# Altium PCB DC TO DC.PcbDoc
Units mil, origin at the board's own origin, x right, y up, seen from the top; angles counter-clockwise.
Board outline 2559.01 x 1392.01 mil, 2 copper layers (Top Layer, Bottom Layer); 10 components, 6 nets, 27 pads, 0 vias.
Unrouted connection lines stored in the file: 2.
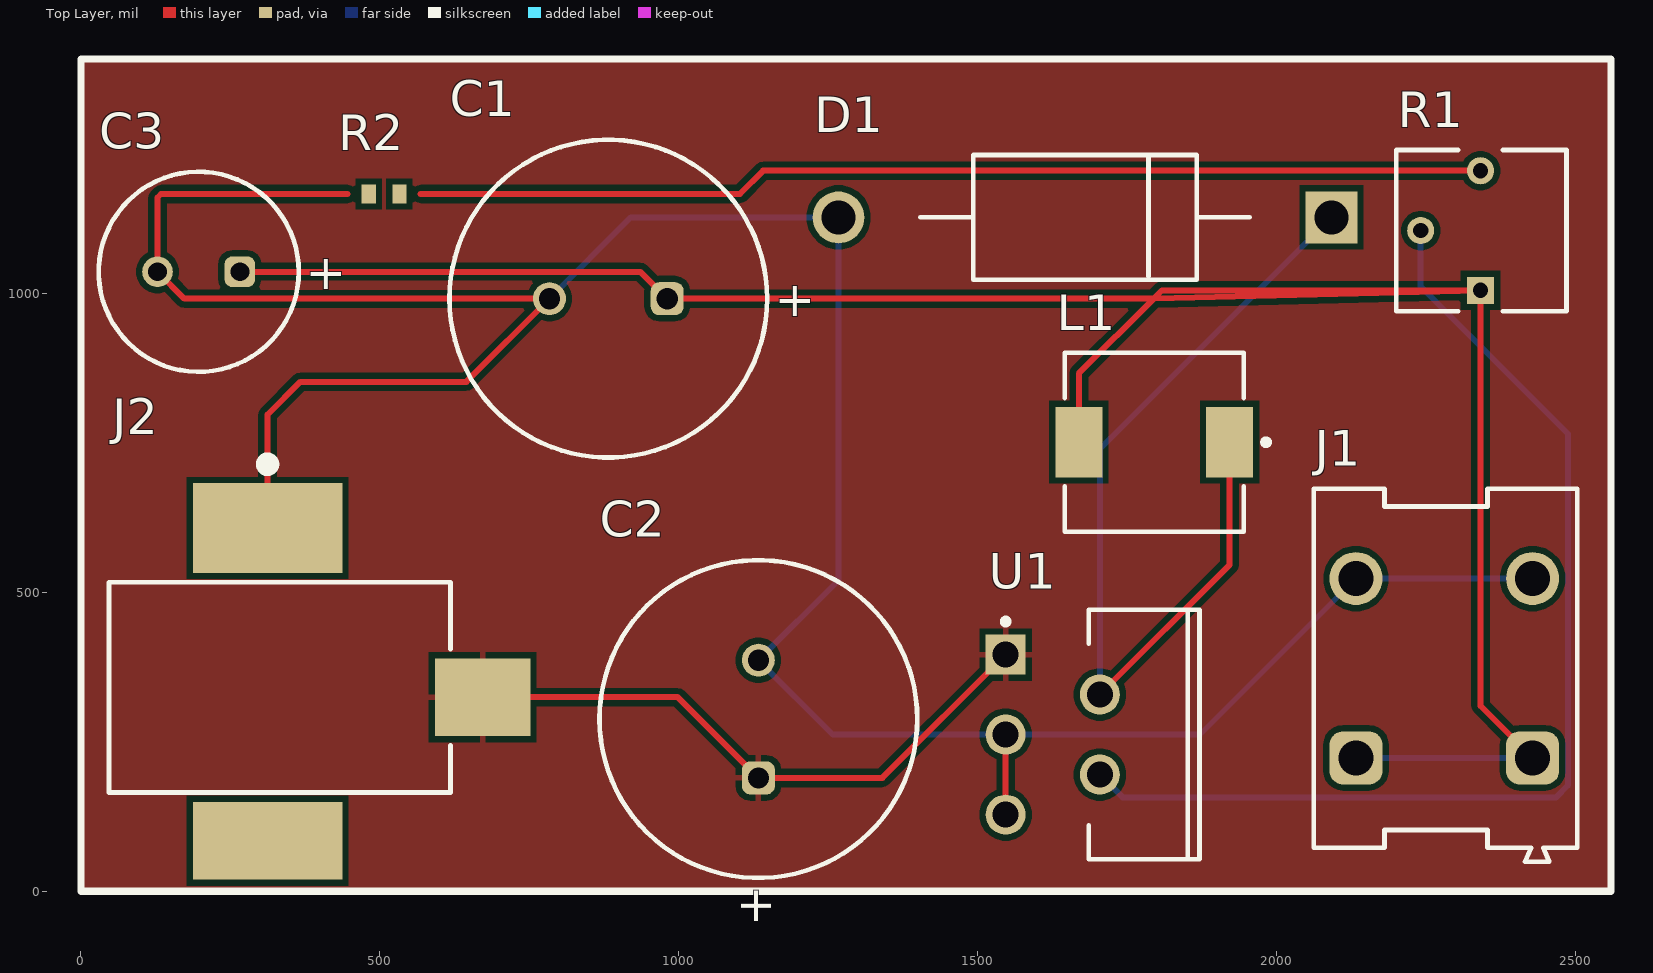
[diagram p0: Top Layer view]
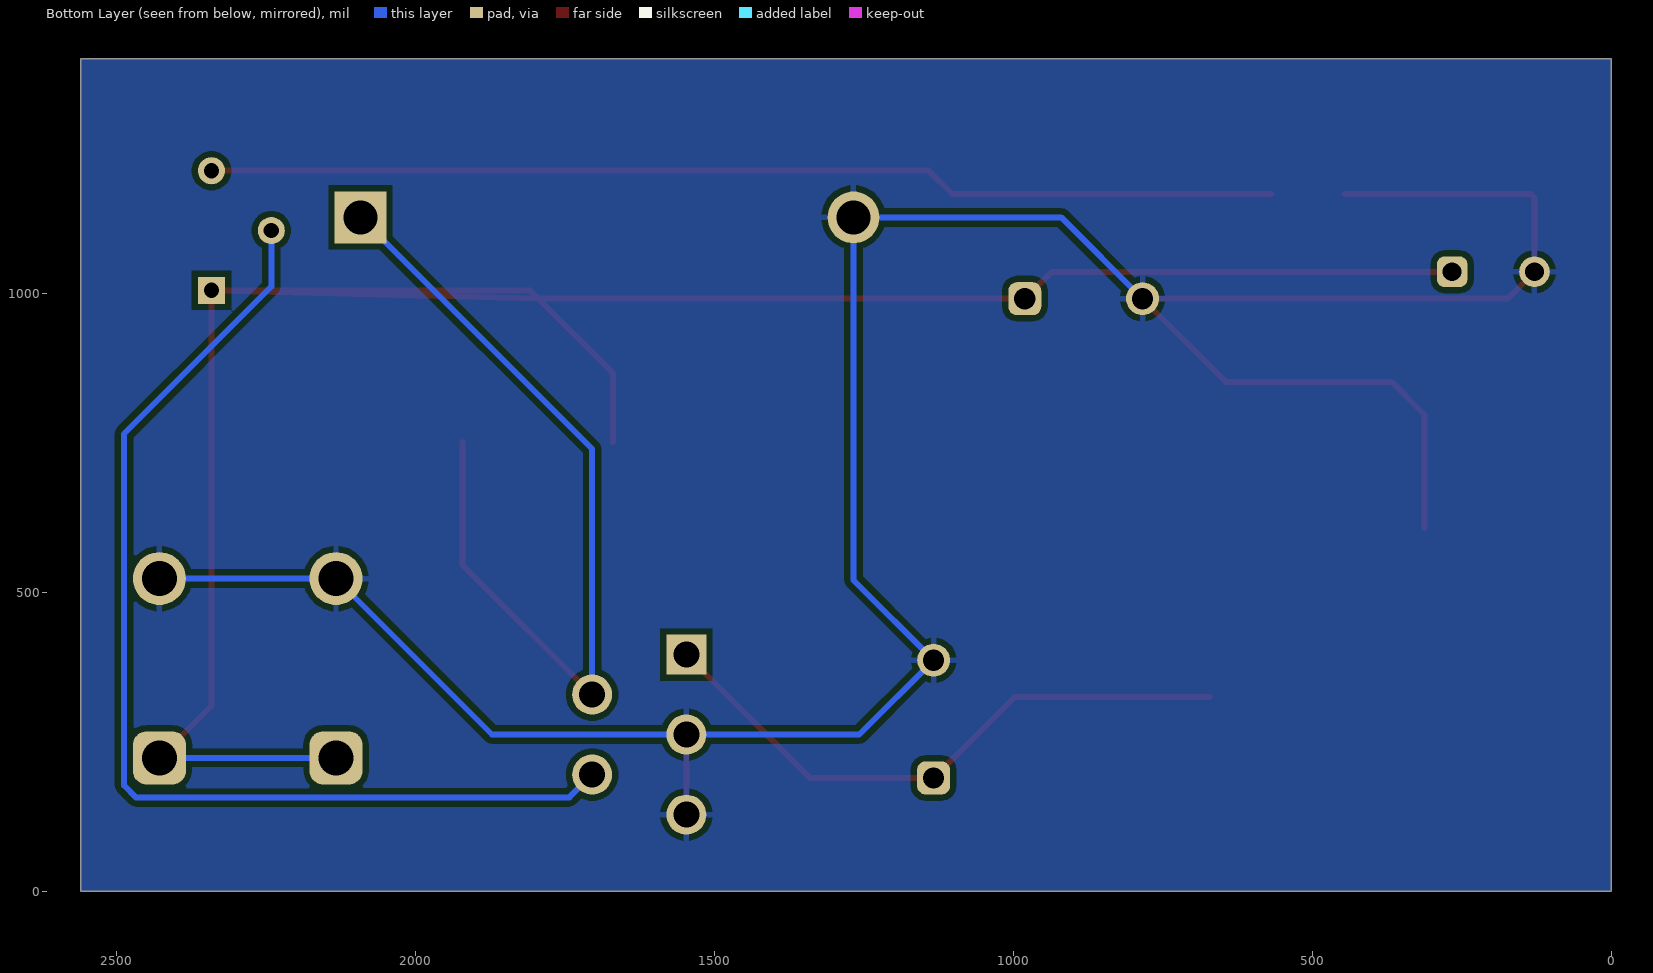
[diagram p1: Bottom Layer view, seen from below]
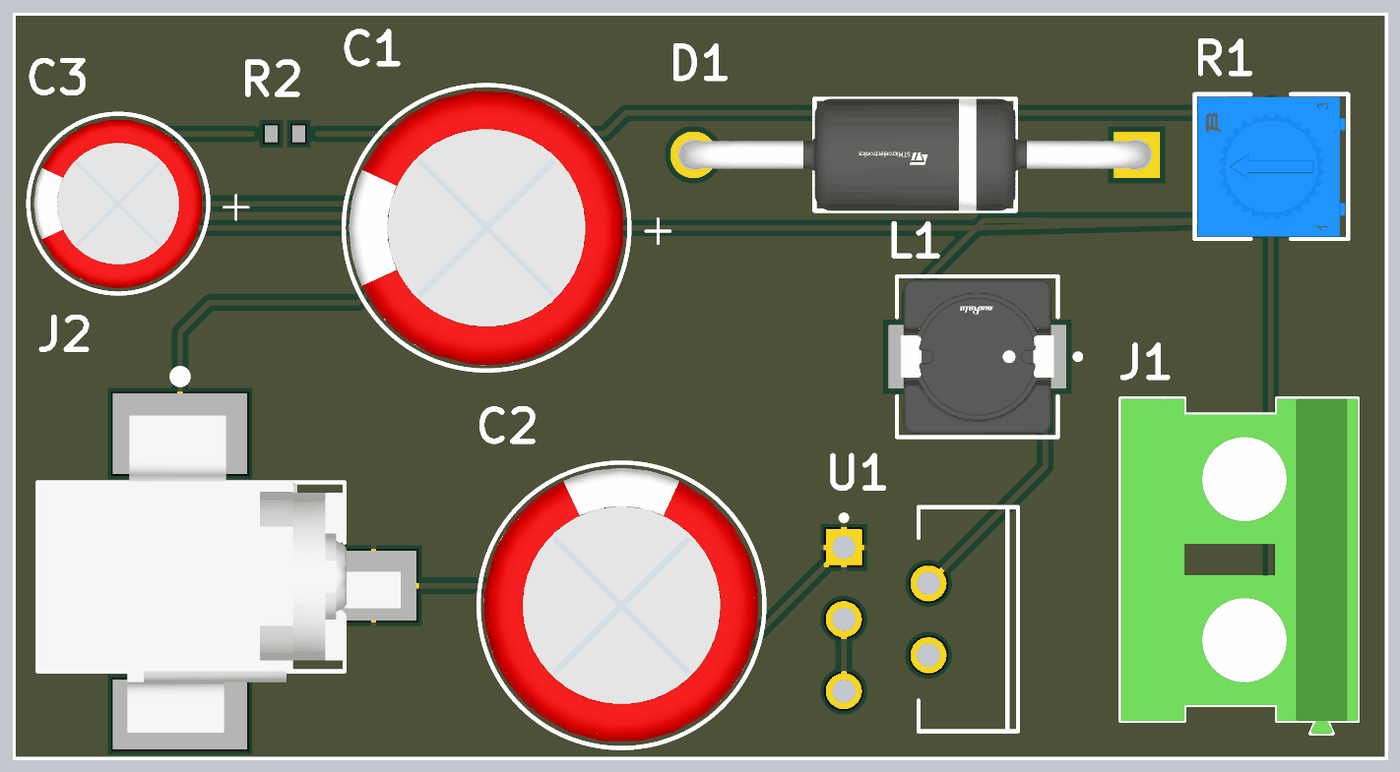
[diagram p2: 3D render of the assembled board from above, using the file's embedded part models]

## Layer stack, top to bottom
Top Solder: solder mask 0.4, Solder Resist, Dk 3.5
Top Layer: signal copper 1.4
Dielectric 1: dielectric 12.6, FR-4, Dk 4.8
Bottom Layer: signal copper 1.4
Bottom Solder: solder mask 0.4, Solder Resist, Dk 3.5

## Board outline
0,0 0,1392.01 2559,1392.01 2559,1082.51 2559.01,365.51 2559.01,0

## Design rules (kind name [scope] priority, off if disabled: settings)
Clearance [All] p1: gap=10 ignorepadtopadclearanceinfootprint=FALSE except(0: Arc-Hole Track-Hole SMDPad-Hole THPad-Hole Via-Hole Fill-Hole Poly-Hole Region-Hole Text-Hole)
PolygonConnect [All] p1: connectstyle=Relief reliefconductorwidth=10 reliefentries=4 polygonreliefangle="90 Angle" airgapwidth=10
RoutingVias [All] p1: holewidth=28 width=50 viastyle="Through Hole" minholewidth=28 minwidth=50 maxholewidth=28 maxwidth=50
SolderMaskExpansion [All] p1: expansion=4 istentingtop=FALSE
Width [All] p1: maxlimit=10 minlimit=10 preferedwidth=10
30 further rules are at their usual default settings.

## Components (designator, comment, footprint, x,y, rotation, side; value= is the part's Value field where it differs from the comment)
C1 "860130878011" WCAP-ATET_D13H25 882.01,991.01 r0 top
C2 "860130878011" WCAP-ATET_D13H25 1133.01,288.01 r270 top
C3 "860160374017" WCAP-ATLL_D8H11.5 197.01,1036.01 r0 top
D1 "1N5822" FP-DO-201AD-MFG 1679.21,1127.01 r180 top
J1 "691254410002" 691254410002 2282.01,373.01 r90 top
J2 "RASM722X" SWIT-RASM722X_V 492.01,346.01 r270 top
L1 "B1047AS-330M=P3" FP-DS75LC-MFG 1795.01,751.01 r180 top
R1 "3362P-1-503TLF" FP-3362P-1-503TLF-MFG 2342.01,1105.01 r90 top
R2 "RC0603FR-071K21L" RESC1608X55X25LL10T15 507.01,1166.01 r180 top value=1.21kR
U1 "LM2596T-12/NOPB" NDH0005A 1625.26,262.08 r270 top

## Footprints (in the part's own frame and the unit in brackets; to place one, negate y for a bottom-side part, rotate by r counter-clockwise, add the part's x,y. Pads: shape width x height; smd on the part's side, far side on the other; paste and mask are expansions set on the pad)
691254410002 [mm] "Serie 2544 - 7.62 mm _ 2 pins"
  rrect50% 2.25x2.25 hole 1.5: 1(-3.81,-3.7) 1(-3.81,3.8)
  round 2.25 hole 1.5: 2(3.81,-3.7) 2(3.81,3.8)
  silkscreen extent -8.22,-5.6 7.62,5.6, body extent -8.22,-5.6 7.62,5.6, height 18.05
FP-3362P-1-503TLF-MFG [mm]
  rect 1.15x1.15 hole 0.65 paste-1000 mask+0: 1(-2.54,0.035)
  round 1.15 hole 0.65 paste-1000 mask+0: 2(0,2.575) 3(2.54,0.035)
  silkscreen extent -3.42,-3.62 3.42,3.62, body extent -3.52,-3.72 3.52,3.72, height 0.25
FP-DO-201AD-MFG [mm]
  rect 2.2x2.2 hole 1.45 paste-1000 mask+0: 1(-10.47,0)
  round 2.2 hole 1.45 paste-1000 mask+0: 2(10.47,0)
  silkscreen extent -7,-2.65 7,2.65, body extent -11.67,-2.75 11.67,2.75, height 0.25
FP-DS75LC-MFG [mm]
  rect 2x3 smd paste+0 mask+0: 1(-3.2,0) 2(3.2,0)
  silkscreen extent -4.88,-3.8 3.8,3.8, body extent -4.3,-3.9 4.3,3.9, height 0.25
NDH0005A [mm] "FM, 5-Leads, Body 10.6x4.7mm, Pitch 1.7mm"
  rect 1.7x1.7 hole 1.1: 1(-3.4,-2)
  round 1.7 hole 1.1: 2(-1.7,2) 3(0,-2) 4(1.7,2) 5(3.4,-2)
  silkscreen extent -5.3,-2.12 5.3,6.23, body extent -5.35,-2.31 5.35,6.28, height 21.1
RESC1608X55X25LL10T15 [mm] "Chip Resistor, 2-Leads, Body 1.60x0.80mm, IPC High Density"
  rect 0.6x0.8 smd: 1(-0.65,0) 2(0.65,0)
  body extent -0.85,-0.45 0.85,0.45, height 0.55
SWIT-RASM722X_V [mm] "SMD, 3-Leads, Body 14.5x9mm"
  rect 3.81x6.35 smd: 1(-6.645,-4.57)
  rect 3.3x4.06 smd: 2(0.545,4.57)
  rect 3.3x6.35 smd: 3(6.645,-4.57)
  silkscreen extent -9.6,-11.3 4.6,3.2, body extent -7.5,-11.23 7.5,5.84, height 11.1
WCAP-ATET_D13H25 [mm] "Aluminum Electrolytic Capacitors, 13x25mm"
  rrect50% 1.4x1.4 hole 0.9: 1(2.5,0)
  round 1.4 hole 0.9: 2(-2.5,0)
  silkscreen extent -6.75,-6.75 6.75,6.75, body extent -6.49,-6.5 6.5,6.5, height 25.26
WCAP-ATLL_D8H11.5 [mm] "Aluminum Electrolytic Capacitors, 8x11.5mm"
  rrect50% 1.3x1.3 hole 0.8: 1(1.75,0)
  round 1.3 hole 0.8: 2(-1.75,0)
  silkscreen extent -4.25,-4.25 4.25,4.25, body extent -3.99,-4 4,4, height 11.81

## Part data
C1 C2: library part CMP-03913-54218110-1, "860130878011 WCAP-ATET Aluminum Electrolytic Capacitors", Capacitance=100µF, Case/Package=Radial, Leakage Current=100µA, Max Operating Temperature=125°C, Min Operating Temperature=-40°C, Ripple Current=270mA, Tolerance=20%, Voltage Rating=100V, Diameter=13mm, Height - Seated (Max)=26.4922mm, Lead Pitch=5.0038mm, Length=25mm, Life (Hours)=2000hours, Mount="Through Hole", NexarPartId=54218110, Packaging="Tape & Box (TB)", Pitch=5mm, Polarity=Polar, RoHS=Compliant
C3: library part CMP-03913-55434149-1, "860160374017 Aluminium Electrolytic Capacitor-Leaded Rohs Compliant: Yes", Capacitance=220µF, Leakage Current=35.2µA, Ripple Current=540mA, Voltage Rating=16V, Diameter=8mm, Length=11.5mm, NexarPartId=55434149, Pitch=3.5mm, RoHS=Non-Compliant
D1: library part CMP-12187-000025-1, "DIODE SCHOTTKY 40V 3A DO201AD", Forward Current=3A, Manufacturer=STMicroelectronics, Max Junction Temp=+150°C, Max Repetitive Reverse Voltage=40V, Max Surge Forward Current=80A, Package=DO-201AD, Peak Reverse Current=2mA, Temperature="to +150°C", Automotive=No, Category=Diode, ComponentLink2Description=Datasheet, ComponentLink2URL=https://www.st.com/resource/en/datasheet/1n5822.pdf, Device Class L1="Discrete Semiconductors", Device Class L2=Diodes, Device Class L3="Schottky Diodes", Digikey Description="DIODE SCHOTTKY 40V 3A DO201AD", Height=5.3mm, Lead Free=Yes, Manufacturer Part Number=1N5822, Mouser Description="Schottky Diodes & Rectifiers Vr/40V Io/3A BULK", Octopart=https://octopart.com/1n5822-stmicroelectronics-323225, RoHS=TRUE, Temperature Range High=+150°C
J1: library part CMP-1502-02748-2, NexarPartId=105950827
J2: library part CMP-002-00013-2, "Power Jack, 5 A, 250 V, 3-Pin SMD, RoHS, Bulk", Manufacturer=Switchcraft, Package Description="3-Pin Surface Mount Device, Body 14.5 x 9 mm", Case/Package=RASM722X, Connector Type=DCJack, Datasheet URL=http://www.switchcraft.com/Drawings/rasm732x_cd.pdf, Datasheet Version="Rev. A, 09/2005", Manufacturer URL=http://www.switchcraft.com/, Mounting Technology=SM, Package Reference=RASM722X, RoHS Compliant=Unknown
L1: library part CMP-06042-002233-1, "Shielded Wirewound Inductor 33uH 20% 1500mA 0.17Ω SMD", Case/Package=Nonstandard, Current rating=1.5A, DC Resistance (DCR)=170mR, Inductance=33uH, Max Operating Temperature=85°C, Min Operating Temperature=-40°C, Resistor Type=Wirewound, Saturation Current=1.64A, Test Frequency=100kHz, Tolerance=20%, Core Material=Ferrite, Height - Seated (Max)=0.197inch, Length=0.299inch, Mount="Surface Mount", Packaging="Tape and Reel", Shielding=Shielded, Width=0.299inch
R1: library part CMP-07234-000028-1, "TRIMMER 50K OHM 0.5W PC PIN TOP", Max Operating Temperature=125°C, Max Power Dissipation=500mW, Min Operating Temperature=-55°C, Package Quantity=50, Resistance=50kR, Resistance Tolerance=10%, Resistor Type=Cermet, Temperature Coefficient=100ppm/°C, Voltage Rating (DC)=300V, Depth=7.04mm, Height=0.185inch, Lead Free="Lead Free", Length=6.6mm, Military Standard=Not, Mount="Through Hole", Number of Turns=1, Packaging=Rail/Tube, Power Rating=500mW, Radiation Hardening=No, REACH SVHC="No SVHC", RoHS Compliant=Yes, Series="Trimpot® 3362 - Sealed", Technology=CERMET, Termination=Pin, Tolerance=10%, Weight=0.02oz, Width=4.7mm
R2: library part CMP-2000-03933-1, Manufacturer=Yageo, Part Number=RC0603FR-071K21L
U1: library part CMP-0069-01925-3, "SIMPLE SWITCHER® Power Converter 150 KHz 3A Step-Down Voltage Regulator, 5-pin TO-220, Pb-Free", Manufacturer="Texas Instruments", PackageTopMarking="NSUZXYTTE#*LM2596T*-12 P+", PowerWise=N, ComponentLink1Description="Datasheet URL", ComponentLink1URL=http://www.ti.com/general/docs/lit/getliterature.tsp?genericPartNumber=LM2596&fileType=pdf, CompType=Switcher, PackageDescription="TO-220, Molded, Stagger Bend, 5 Lead", PackageReference=NDH0005A, PinCount=5, RoHS=Y

## Nets (pads, with @x,y where several pads share a name; then routed paths per layer and width w, separated by ;. In a path a pad name is that pad's centre, name@x,y a point inside that pad or via, vN(x,y) a via of type N, cw(c..) or ccw(c..) an arc to the next point about the centre after c; other vN are vias at no path point)
Feedback: R1.2 U1.4 | length 1837.1
  Bottom Layer w10: U1.4 1742.15,157.01 2467.01,157.01 2487.01,177.01 2487.01,765.01 2240.63,1011.38 R1.2
GND: C1.2 C2.2 C3.2 D1.2 J1.2 J2.1 R2.1 U1.3 U1.5 | length 4783.8
  Top Layer w10: J2.1 312.08,797.11 367.01,852.03 644.6,852.03 C1.2 173.11,991.01 C3.2 128.11,1160.15 133.97,1166.01 445.98,1166.01 ; U1.5 U1.3
  Bottom Layer w10: C1.2 919.58,1127.01 D1.2 1267,520.43 C2.2 1257.36,262.08 U1.3 1871.47,262.08 2132.4,523.01 J1.2@2427.68,523.01
NetD1_1: D1.1 L1.1 U1.2 | length 1470.3
  Top Layer w10: U1.2 1920.99,545.99 L1.1
  Bottom Layer w10: U1.2 1704.01,739.6 D1.1
NetR1_3: R1.3 R2.2 | length 1788.8
  Top Layer w10: 568.03,1166.01 1102.01,1166.01 1141.01,1205.01 R1.3
OUT: C1.1 C3.1 J1.1 L1.2 R1.1 | length 4051.1
  Top Layer w10: C3.1 935.43,1036.01 C1.1 1794.01,991.01 ; L1.2 1669.02,866.02 1794.01,991.01 ; J1.1@2427.68,223.01 2340.63,310.05 R1.1 ; 1794.01,991.01 1808.01,1005.01 R1.1 ; 1794.01,991.01 R1.1
  Bottom Layer w10: J1.1@2132.4,223.01 J1.1@2427.68,223.01
VCC: C2.1 J2.2 U1.1 | length 1016
  Top Layer w10: J2.2 998.04,324.55 C2.1 1340.17,189.58 U1.1
pads on no net: J2.3

## Polygon pours and split planes (outlines as drawn)
VCC on Top Layer "VCC_L01_P000" (solid, pour order 0): 0,1392 2559,1392 2559,0 0,0
GND on Bottom Layer "GND_L02_P001" (solid, pour order 1): 0,1392 2559,1392 2559,0 0,0

## Silkscreen, mask and mechanical layers (free items; w line width, h text height)
Top Overlay:
  lines w11.81: 0.01,1388.02 cw(c3.99,1388.02) 3.99,1392.01 ; 0,0 2559.01,0 2559.01,365.51 2559,1082.51 2559,1392.01 0,1392.01 0,2.26 0,0

## Text inside footprints (layer, text, board x,y; h text height)
C1: Top Overlay "+" at 1160.55,961.99 h59.06
C2: Top Overlay "+" at 1103.99,9.46 h59.06 r270
C3: Top Overlay "+" at 376.14,1006.48 h59.06